# Altium PCB Copy of PCB_Winterbreak_final_404.PcbDoc
Units mil, origin at the board's own origin, x right, y up, seen from the top; angles counter-clockwise.
Board outline 8430 x 4105 mil, 2 copper layers (Top Layer, Bottom Layer); 50 components, 53 nets, 234 pads, 74 vias.
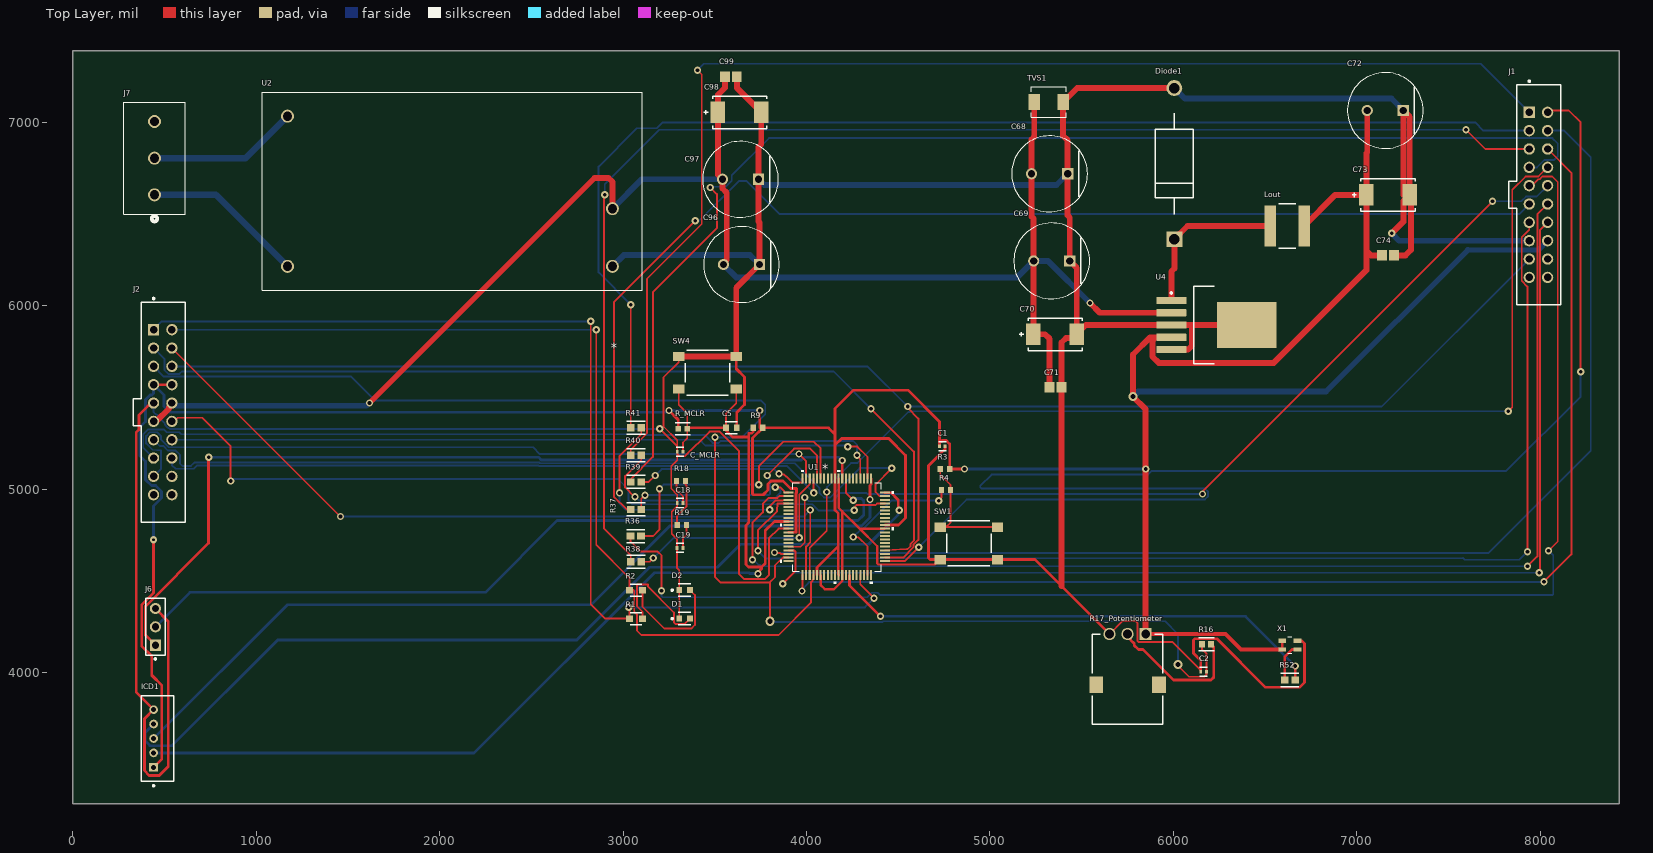
[diagram p0: Top Layer view]
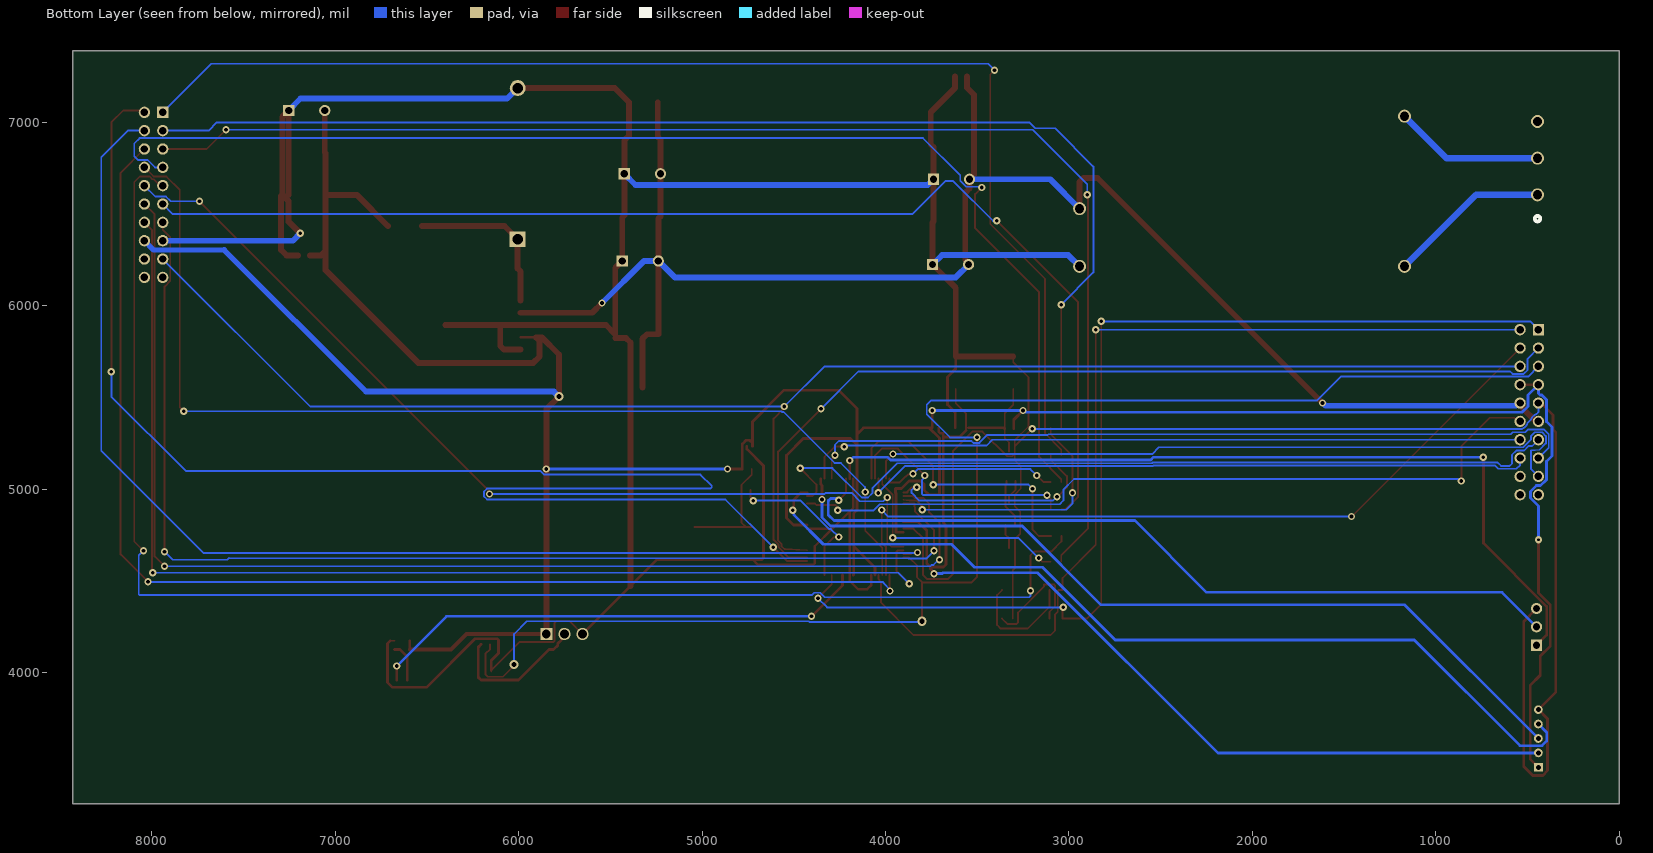
[diagram p1: Bottom Layer view, seen from below]

## Layer stack, top to bottom
Top Solder: solder mask 0.4, Solder Resist, Dk 3.5
Top Layer: signal copper 1.4
Dielectric 1: dielectric 12.6, FR-4, Dk 4.8
Bottom Layer: signal copper 1.4
Bottom Solder: solder mask 0.4, Solder Resist, Dk 3.5

## Board outline
0,3285 8430,3285 8430,7390 0,7390

## Design rules (kind name [scope] priority, off if disabled: settings)
Clearance [All] p1: gap=5 ignorepadtopadclearanceinfootprint=FALSE
ComponentClearance [All] p1 off: gap=10 collisioncheckmode=3 verticalgap=10 showdistances=FALSE
DiffPairsRouting [All] p1: maxlimit=13 minlimit=13 mostfreqgap=13 toplayer_minwidth=7.42 toplayer_maxwidth=13 toplayer_prefwidth=7.42 bottomlayer_minwidth=7.42 bottomlayer_maxwidth=13 bottomlayer_prefwidth=7.42 maxuncoupledlength=500
FabricationTestPointUsage TestPointUsage [All] p1: valid=0 allowmultiple=FALSE
FabricationTestpoint Testpoint [All] p1: side=3 testpointundercomponent=TRUE minsize=40 maxsize=100 preferedsize=60 minholesize=20 maxholesize=40 preferedholesize=32 testpointgrid=1 allowsidetop=TRUE allowsidebottom=TRUE usegrid=TRUE gridtolerance=0.01
Height [All] p1 off: minheight=0 maxheight=1000 prefheight=500
HoleSize [All] p1: absolutevalues=TRUE maxlimit=800 minlimit=10 maxpercent=80.000 minpercent=20.000
MatchedLengths MatchedLengths_I210Rx [InNetClass('I210Rx')] p1: tolerance=5 checknetsindiffpair=FALSE checkdiffpairvsdiffpair=TRUE checkxsignals=TRUE checkothers=TRUE
MatchedLengths MatchedLengths_I210Tx [InNetClass('I210Tx')] p2: tolerance=5 checknetsindiffpair=FALSE checkdiffpairvsdiffpair=TRUE checkxsignals=TRUE checkothers=TRUE
MatchedLengths MatchedLengths_mSATARx [InNetClass('mSATARx')] p3: tolerance=25 checknetsindiffpair=FALSE checkdiffpairvsdiffpair=TRUE checkxsignals=TRUE checkothers=TRUE
MatchedLengths MatchedLengths_mSATATx [InNetClass('mSATATx')] p4: tolerance=25 checknetsindiffpair=FALSE checkdiffpairvsdiffpair=TRUE checkxsignals=TRUE checkothers=TRUE
MatchedLengths MatchedLengths_PCIECLK [InNetClass('PCIECLK')] p5: tolerance=25 checknetsindiffpair=FALSE checkdiffpairvsdiffpair=TRUE checkxsignals=TRUE checkothers=TRUE
MatchedLengths MatchedLengths_PCIETx [InNetClass('PCIETx')] p6: tolerance=5 checknetsindiffpair=FALSE checkdiffpairvsdiffpair=TRUE checkxsignals=TRUE checkothers=TRUE
MatchedLengths MatchedLengths_PCIERx [InNetClass('PCIERx')] p7: tolerance=5 checknetsindiffpair=FALSE checkdiffpairvsdiffpair=TRUE checkxsignals=TRUE checkothers=TRUE
MinimumSolderMaskSliver [All] p1: minsoldermaskwidth=3.8
PlaneConnect [All] p1: planeconnectstyle=Relief reliefexpansion=20 reliefentries=4 reliefconductorwidth=15 reliefairgap=10
PolygonConnect [All] p1: connectstyle=Direct reliefconductorwidth=20 reliefentries=4 polygonreliefangle="90 Angle" airgapwidth=30
RoutingVias [All] p1: holewidth=20 width=40 viastyle="Through Hole" minholewidth=15 minwidth=35 maxholewidth=28 maxwidth=50
SilkToSilkClearance [All] p1: silktosilkclearance=5
SilkToSolderMaskClearance SilkscreenOverComponentPads [IsPad] p1: minsilkscreentomaskgap=5 clearancetoexposedcopper=TRUE
SolderMaskExpansion [All] p1: expansion=4 istentingtop=FALSE
SupplyNets "Schematic Supply Nets" [InNet('GND')] p1: voltage=0.000
Width [All] p1: maxlimit=500 minlimit=5 preferedwidth=10
20 further rules are at their usual default settings.

## Components (designator, comment, footprint, x,y, rotation, side; value= is the part's Value field where it differs from the comment)
C1 "GRM155R71C104KA88D" FP-GRM15-MFG 4740,5235 r180 top value=0.10μF
C2 "GRM155R71C104KA88D" FP-GRM15-MFG 6165,4005 r0 top value=0.10μF
C5 "CC0603KRX7R9BB471" FP-CC0603-DA-MFG 3590,5335 r0 top value="470 pF"
C18 "GRM155R71C104KA88D" FP-GRM15-MFG 3310.75,4925 r0 top value=0.10μF
C19 "GRM155R71C104KA88D" FP-GRM15-MFG 3310,4680 r0 top value=0.10μF
C68 "EEHAZS1H221B" FP-EEHA-G16-MFG 5325,6720 r180 top
C69 "EEHAZS1H221B" FP-EEHA-G16-MFG 5336.57,6245 r180 top
C70 "TAJE476K035RNJ" FP-TAJE-MFG 5355,5845 r180 top
C71 "08055C104KAZ2A" CAPC2013X94X50NL20T25 5357.48,5555 r180 top
C72 "EEHAZS1H221B" FP-EEHA-G16-MFG 7155,7065 r180 top
C73 "TAJE476K035RNJ" FP-TAJE-MFG 7170,6605 r180 top
C74 "08055C104KAZ2A" CAPC2013X94X50NL20T25 7170,6275 r180 top
C96 "EEHAZS1H221B" FP-EEHA-G16-MFG 3645,6225 r180 top
C97 "EEHAZS1H221B" FP-EEHA-G16-MFG 3640,6690 r180 top
C98 "TAJE476K035RNJ" FP-TAJE-MFG 3635,7055 r180 top
C99 "08055C104KAZ2A" CAPC2013X94X50NL20T25 3587.48,7250 r180 top
C_MCLR "GRM155R71C104KA88D" FP-GRM15-MFG 3310.75,5205 r0 top value=0.10μF
D1 "LTST-C190KGKT" FP-LTST-C190KGKT-MFG 3335,4295 r0 top
D2 "LTST-C190KGKT" FP-LTST-C190KGKT-MFG 3335,4450 r0 top
Diode1 "1N5822" FP-DO-201AD-MFG 6005,6775 r90 top
ICD1 "B5B-PH-K-S(LF)(SN)" FP-B5B-PH-K-S_LF_SN-MFG 461.65,3641.26 r90 top
J1 "SFH11-PBPC-D10-ST-BK" FP-SFH11-PBPC-D10-ST-BK-MFG 7970.31,6605 r270 top
J2 "SFH11-PBPC-D10-ST-BK" FP-SFH11-PBPC-D10-ST-BK-MFG 470.31,5420 r270 top
J6 "PREC003SAAN-RC" FP-PREC003SAAN-RC-MFG 450,4250 r90 top
J7 "TB006-508-03BE" CONN3_TB006-508_CUD 445,6605 r90 top
Lout "NR6028T680M" FP-NR6028-MFG 6620,6435 r0 top
R1 "RN73A1J470RFTD" FP-RN731J-MFG 3070,4295 r0 top value=470Ω
R2 "RN73A1J470RFTD" FP-RN731J-MFG 3070,4450 r0 top value=470Ω
R3 "ERJ3EKF1002V" RESC1609X55X30LL15T15 4754.41,5110 r0 top
R4 "ERJ-3EKF1001V" RESC1608X55X30LL15T15 4760,4995 r0 top
R9 "ERJ3EKF1002V" RESC1609X55X30LL15T15 3735.59,5335 r0 top
R16 "RR0816P-331-D" FP-RR0816-IPC_C 6180,4155 r0 top
R17_Potentiometer "P090S-14T20BR10K" RES-POT-3 5750,3935 r180 top
R18 "ERJ-3EKF1000V" RESC1608X55X30LL15T15 3315,5045 r0 top
R19 "ERJ3EKF1002V" RESC1609X55X30LL15T15 3320,4805 r0 top
R36 "RR0816Q-750-D" FP-RR0816-IPC_B 3068.57,4745 r180 top
R37 "RR0816Q-750-D" FP-RR0816-IPC_B 3070,4890 r180 top
R38 "RR0816Q-750-D" FP-RR0816-IPC_B 3070,4605 r180 top
R39 "RR0816Q-750-D" FP-RR0816-IPC_B 3070,5040 r180 top
R40 "RR0816Q-750-D" FP-RR0816-IPC_B 3070,5185 r180 top
R41 "RR0816Q-750-D" FP-RR0816-IPC_B 3070,5335 r180 top
R52 "RR0816Q-750-D" FP-RR0816-IPC_B 6635,3960 r0 top
R_MCLR "ESR03EZPJ103" FP-ESR03-IPC_C 3325,5330 r180 top
SW1 "430182043816" 430182043816 4885,4705 r0 top
SW4 "430182043816" 430182043816 3460,5635 r0 top
TVS1 "SZ1SMB36CAT3G" SMB-2_4P60X3P95_ONS 5320,7110 r180 top
U1 "DSPIC33CK256MP508-IPT" TQFP80_PT_MCH 4165,4795 r0 top
U2 "IRM-15-15" IRM-15_MWU 2941.65,6215 r180 top
U4 "LM2595S-3.3/NOPB" KTT0005B_N 6234.65,5895 r0 top
X1 "KC2520Z8.00000C1KX00" OSC_0C1KX00_AVX 6635,4150 r0 top

## Footprints (in the part's own frame and the unit in brackets; to place one, negate y for a bottom-side part, rotate by r counter-clockwise, add the part's x,y. Pads: shape width x height; smd on the part's side, far side on the other; paste and mask are expansions set on the pad)
430182043816 [mm] "SMD Tact Switch, body 6x6mm"
  rect 1.55x1.3 smd: A1(-3.975,2.25) A2(3.975,2.25) B1(-3.975,-2.25) B2(3.975,-2.25)
  silkscreen extent -3.1,-3.1 3.1,3.1, body extent -4.5,-3.1 4.5,3.1, height 4.3
CAPC2013X94X50NL20T25 [mm] "Chip Capacitor, 2-Leads, Body 2.01x1.25mm, IPC Medium Density"
  rect 1.35x1.45 smd: 1(-0.825,0) 2(0.825,0)
  body extent -1.1,-0.73 1.1,0.73, height 0.94
CONN3_TB006-508_CUD [mil]
  round 71 / inner round 60 / far side round 71 hole 51 paste-99999 mask+0: 1(0,0) 2(200,0) 3(400,0)
  silkscreen extent -145,-166 505,167
FP-B5B-PH-K-S_LF_SN-MFG [mm]
  rect 1.2x1.2 hole 0.7 paste-2539.97 mask+0: 1(-4,0.55)
  round 1.2 hole 0.7 paste-2539.97 mask+0: 2(-2,0.55) 3(0,0.55) 4(2,0.55) 5(4,0.55)
  silkscreen extent -6.67,-2.25 5.95,2.25, body extent -6.05,-2.35 6.05,2.35, height 0.25
FP-CC0603-DA-MFG [mm]
  rect 0.8x0.9 smd paste+0 mask+0: 1(-0.75,0) 2(0.75,0)
  silkscreen extent -0.85,-0.85 0.85,0.85, body extent -1.35,-0.75 1.35,0.75, height 0.25
FP-DO-201AD-MFG [mm]
  rect 2.2x2.2 hole 1.45 paste-2539.97 mask+0: 1(-10.47,0)
  round 2.2 hole 1.45 paste-2539.97 mask+0: 2(10.47,0)
  silkscreen extent -7,-2.65 7,2.65, body extent -11.67,-2.75 11.67,2.75, height 0.25
FP-EEHA-G16-MFG [mm]
  rect 1.55x1.55 hole 1 paste-2539.97 mask+0: 1(-2.5,0)
  round 1.55 hole 1 paste-2539.97 mask+0: 2(2.5,0)
  silkscreen extent -5.25,-5.25 5.25,5.25, body extent -5.35,-5.35 5.35,5.35, height 0.25
FP-ESR03-IPC_C [mil]
  rect 29.85x31.97 smd paste+0 mask+0: 1(-24.68,0) 2(24.68,0)
  silkscreen extent -40,-33 40,33, body extent -44,-22 44,22, height 10
FP-GRM15-MFG [mm]
  rect 0.4x0.5 smd paste+0 mask+0: 1(-0.4,0) 2(0.4,0)
  silkscreen extent -0.53,-0.62 0.53,0.62, body extent -0.7,-0.38 0.7,0.38, height 0.25
FP-LTST-C190KGKT-MFG [mm]
  rect 0.8x0.8 smd paste+0 mask+0: 1(-0.75,0) 2(0.75,0)
  silkscreen extent -1.85,-0.87 0.85,0.87, body extent -1.25,-0.55 1.25,0.55, height 0.25
FP-NR6028-MFG [mm]
  rect 1.6x5.7 smd paste+0 mask+0: 1(-2.35,0) 2(2.35,0)
  silkscreen extent -1.18,-3.1 1.18,3.1, body extent -3.25,-3.2 3.25,3.2, height 0.25
FP-PREC003SAAN-RC-MFG [mm]
  rect 1.55x1.55 hole 1 paste-2539.97 mask+0: 1(-2.54,0)
  round 1.55 hole 1 paste-2539.97 mask+0: 2(0,0) 3(2.54,0)
  silkscreen extent -4.57,-1.37 3.96,1.37, body extent -4.06,-1.47 4.06,1.47, height 0.25
FP-RN731J-MFG [mm]
  rect 1x0.9 smd paste+0 mask+0: 1(-0.9,0) 2(0.9,0)
  silkscreen extent -0.78,-0.82 0.78,0.82, body extent -1.5,-0.55 1.5,0.55, height 0.25
FP-RR0816-IPC_B [mil]
  rect 41.53x39.61 smd paste+0 mask+0: 1(-28.57,0) 2(28.57,0)
  silkscreen extent -49,-36 49,36, body extent -59,-30 59,30, height 10
FP-RR0816-IPC_C [mil]
  rect 33.66x35.68 smd paste+0 mask+0: 1(-24.63,0) 2(24.63,0)
  silkscreen extent -41,-35 41,35, body extent -45,-24 45,24, height 10
FP-SFH11-PBPC-D10-ST-BK-MFG [mm]
  rect 1.57x1.57 hole 1.02 paste-2539.97 mask+0: 1(-11.43,-0.77)
  round 1.57 hole 1.02 paste-2539.97 mask+0: 2(-11.43,1.77) 3(-8.89,-0.77) 4(-8.89,1.77) 5(-6.35,-0.77) 6(-6.35,1.77) 7(-3.81,-0.77) 8(-3.81,1.77) 9(-1.27,-0.77) 10(-1.27,1.77) 11(1.27,-0.77) 12(1.27,1.77) 13(3.81,-0.77) 14(3.81,1.77) 15(6.35,-0.77) 16(6.35,1.77) 17(8.89,-0.77) 18(8.89,1.77) 19(11.43,-0.77) 20(11.43,1.77)
  silkscreen extent -15.86,-3.6 15.24,3.6, body extent -15.34,-3.7 15.34,3.7, height 0.25
FP-TAJE-MFG [mm]
  rect 2x3 smd paste+0 mask+0: 1(-3,0) 2(3,0)
  silkscreen extent -3.75,-2.25 4.97,2.25, body extent -4.1,-2.35 4.1,2.35, height 0.25
IRM-15_MWU [mil]
  round 71 / inner round 60 / far side round 71 hole 51 paste-99999 mask+0: 1(0,0) 2(0,-314.96) 3(1771.65,-818.9) 4(1771.65,0)
  silkscreen extent -162,-950 1911,131
KTT0005B_N [mm] "DPAK, 5-Leads, Body 10.65x9.65mm, Pitch 1.7mm, IPC Medium Density"
  rrect10% 4.15x1 smd: 1(-6.25,3.4) 2(-6.25,1.7) 3(-6.25,0) 4(-6.25,-1.7) 5(-6.25,-3.4)
  rrect2% 8.2x6.4 smd: 6(4.2,0)
  silkscreen extent -6.37,-5.35 -0.3,5.35, body extent -3.15,-5.32 6.5,5.33, height 4.83
OSC_0C1KX00_AVX [mil]
  rect 42x24 smd paste+0 mask+0: 1(-42,23.62) 2(42,23.62) 3(42,-23.62) 4(-42,-23.62)
  silkscreen extent -11,-44 11,44, body extent -49,-37 49,37, height 32
RES-POT-3 [mm] "POT, 3-Leads, Body 9.8x12.5mm, Pitch 2.5mm"
  rect 1.7x1.7 hole 1.2: 1(-2.5,-7)
  round 1.7 hole 1.2: 2(0,-7) 3(2.5,-7)
  rect 1.9x2.3 smd: MP1(-4.35,0) MP2(4.35,0)
  silkscreen extent -4.9,-7 4.9,5.5, body extent -4.9,-7 4.9,5.5, height 26.8
RESC1608X55X30LL15T15 [mm] "Chip Resistor, 2-Leads, Body 1.60x0.80mm, IPC High Density"
  rect 0.7x0.85 smd: 1(-0.625,0) 2(0.625,0)
  body extent -0.87,-0.48 0.87,0.48, height 0.55
RESC1609X55X30LL15T15 [mm] "Chip Resistor, 2-Leads, Body 1.75x0.95mm, IPC High Density"
  rect 0.75x0.85 smd: 1(-0.65,0) 2(0.65,0)
  body extent -0.87,-0.48 0.87,0.48, height 0.55
SMB-2_4P60X3P95_ONS [mil]
  rect 63x87 smd paste+0 mask+0: 1(-78.5,0) 2(78.5,0)
  silkscreen extent -96,-83 96,83, body extent -110,-78 110,78, height 95
TQFP80_PT_MCH [mil]
  rect 53.5x11 smd paste+0 mask+0: 1(-262.75,187.01) 2(-262.75,167.32) 3(-262.75,147.64) 4(-262.75,127.95) 5(-262.75,108.27) 6(-262.75,88.58) 7(-262.75,68.9) 8(-262.75,49.21) 9(-262.75,29.53) 10(-262.75,9.84) 11(-262.75,-9.84) 12(-262.75,-29.53) 13(-262.75,-49.21) 14(-262.75,-68.9) 15(-262.75,-88.58) 16(-262.75,-108.27) 17(-262.75,-127.95) 18(-262.75,-147.64) 19(-262.75,-167.32) 20(-262.75,-187.01) 41(262.75,-187.01) 42(262.75,-167.32) 43(262.75,-147.64) 44(262.75,-127.95) 45(262.75,-108.27) 46(262.75,-88.58) 47(262.75,-68.9) 48(262.75,-49.21) 49(262.75,-29.53) 50(262.75,-9.84) 51(262.75,9.84) 52(262.75,29.53) 53(262.75,49.21) 54(262.75,68.9) 55(262.75,88.58) 56(262.75,108.27) 57(262.75,127.95) 58(262.75,147.64) 59(262.75,167.32) 60(262.75,187.01)
  rect 11x53.5 smd paste+0 mask+0: 21(-187.01,-262.75) 22(-167.32,-262.75) 23(-147.64,-262.75) 24(-127.95,-262.75) 25(-108.27,-262.75) 26(-88.58,-262.75) 27(-68.9,-262.75) 28(-49.21,-262.75) 29(-29.53,-262.75) 30(-9.84,-262.75) 31(9.84,-262.75) 32(29.53,-262.75) 33(49.21,-262.75) 34(68.9,-262.75) 35(88.58,-262.75) 36(108.27,-262.75) 37(127.95,-262.75) 38(147.64,-262.75) 39(167.32,-262.75) 40(187.01,-262.75) 61(187.01,262.75) 62(167.32,262.75) 63(147.64,262.75) 64(127.95,262.75) 65(108.27,262.75) 66(88.58,262.75) 67(68.9,262.75) 68(49.21,262.75) 69(29.53,262.75) 70(9.84,262.75) 71(-9.84,262.75) 72(-29.53,262.75) 73(-49.21,262.75) 74(-68.9,262.75) 75(-88.58,262.75) 76(-108.27,262.75) 77(-127.95,262.75) 78(-147.64,262.75) 79(-167.32,262.75) 80(-187.01,262.75)
  silkscreen extent -310,-310 310,310, body extent -276,-276 276,276, height 47

## Part data
C1 C2 C18 C19 C_MCLR: library part CMP-2100-03641-2, "CAP CER 0.1UF 16V X7R 0402", Capacitance=0.10μF, Manufacturer=Murata, Package=GRM15, Temperature="-55°C to +125°C", Temperature Characteristic=X7R, Temperature Range High=+125°C, Temperature Range Low=-55°C, Tolerance=10%, Voltage Rating=16Vdc, Category=Cap, ComponentLink2Description=Datasheet, ComponentLink2URL=https://search.murata.co.jp/Ceramy/image/img/A01X/G101/ENG/GRM155R71H471KA01-01A.pdf, Device Class L1="Passive Components", Device Class L2=Capacitors, Device Class L3="Ceramic Capacitors", Digikey Description="CAP CER 0.1UF 16V X7R 0402", Height=0.55mm, Ipc Land Pattern Name=CAPC10050X219, Lead Free=yes, Manufacturer Part Number=GRM155R71C104KA88D, Material=Ceramic, Mouser Description="0402 0.1 uF 16V ±10 % Tolerance X7R SMT Multilayer Ceramic Capacitor", Octopart=https://octopart.com/grm155r71c104ka88d-murata-196880, RoHS=TRUE, Standoff Height=0mm
C5: library part CMP-03422-001072-1, "CAP CER 470PF 50V X7R 0603", Capacitance="470 pF", Manufacturer=YAGEO, Package=CC0603-DA, Temperature="-55°C to +125°C", Temperature Characteristic=X7R, Temperature Coefficient=15%, Temperature Range High=+125°C, Temperature Range Low=-55°C, Tolerance=0.1, Voltage="50 V", Automotive=No, Category=Cap, ComponentLink2Description=Datasheet, ComponentLink2URL=http://www.yageo.com/documents/recent/UPY-GPHC_X7R_6.3V-to-50V_18.pdf, Device Class L1="Passive Components", Device Class L2=Capacitors, Device Class L3="Ceramic Capacitors", Digikey Description="CAP CER 470PF 50V X7R 0603", Footprint Url=http://www.yageo.com/exep/pages/download/literatures/UPY-C_GEN_24.pdf, Height=0.9mm, Lead Free=Yes, Manufacturer Part Number=CC0603KRX7R9BB471, Material=Ceramic, Mouser Description="Multilayer Ceramic Capacitors MLCC - SMD/SMT 470pF 50V X7R 10%", Octopart=https://octopart.com/cc0603krx7r9bb471-yageo-192931, RoHS=TRUE, Voltage Rating="50 V"
C68 C69 C72 C96 C97: library part CMP-05428-000537-1, "Conductive Polymer Hybrid Aluminum Electrolytic Capacitors 220uF ±20% 50V RADIAL TH 10x15.7mm", RoHS Compliant=Yes
C70 C73 C98: library part CMP-04424-000247-1, "47uF 35V  ±10% 900mΩ 2917  SMD Tantalum Capacitor", Capacitance=47uF, Case Code (Imperial)=2917, Case Code (Metric)=7343, Dielectric Material=Tantalum, ESR (Equivalent Series Resistance)=900mR, Leakage Current=16.5uA, Max Operating Temperature=125°C, Min Operating Temperature=-55°C, Package Quantity=1, Tolerance=10%, Voltage=35V, Case/Package=2917, Construction=Flat, Depth=4.3mm, Dissipation Factor=6%, Features="General Purpose", Height=4.1mm, Height - Seated (Max)=0.169inch, Lead Free="Lead Free", Length=7.3mm, Mount="Surface Mount", Packaging="Tape and Reel", Polarity=Polar, Radiation Hardening=No, REACH SVHC="No SVHC", RoHS Compliant=Yes, Series=TAJ, Termination=SMD/SMT, Voltage Rating=35V, Voltage Rating (DC)=35V, Width=0.169inch
C71 C74 C99: library part CMP-2007-04372-1, Manufacturer="AVX Interconnect / Elco", Part Number=08055C104KAZ2A
D1 D2: library part CMP-2000-05197-2, "LED GREEN CLEAR CHIP SMD", Case Code (Imperial)=0603, Case Code (Metric)=1608, Color=Green, Forward Current=30mA, Forward Voltage=2V, Lens Color=Colorless, Max Operating Temperature=85°C, Min Operating Temperature=-55°C, Package Quantity=1, Power Dissipation=75mW, Reverse Voltage=5V, Test Current=20mA, Case/Package=0603, Depth=0.8mm, Dominant Wavelength=571nm, Height=0.8mm, Illumination Color=Green, Lead Free="Lead Free", Length=1.6mm, Lens Style=Diffused, Lens Transparency=Clear, Luminous Intensity=35mcd, Mount="Surface Mount", Number of Elements=1, Number of LEDs=1, Number of Pins=2, Packaging="Tape and Reel", Power Rating=75mW, Radiation Hardening=No, Viewing Angle=130°, Wavelength=574nm, Width=0.8mm
Diode1: library part CMP-12187-000025-1, "DIODE SCHOTTKY 40V 3A DO201AD", Forward Current=3A, Manufacturer=STMicroelectronics, Max Junction Temp=+150°C, Max Repetitive Reverse Voltage=40V, Max Surge Forward Current=80A, Package=DO-201AD, Peak Reverse Current=2mA, Temperature="to +150°C", Automotive=No, Category=Diode, ComponentLink2Description=Datasheet, ComponentLink2URL=https://www.st.com/resource/en/datasheet/1n5822.pdf, Device Class L1="Discrete Semiconductors", Device Class L2=Diodes, Device Class L3="Schottky Diodes", Digikey Description="DIODE SCHOTTKY 40V 3A DO201AD", Height=5.3mm, Lead Free=Yes, Manufacturer Part Number=1N5822, Mouser Description="Schottky Diodes & Rectifiers Vr/40V Io/3A BULK", Octopart=https://octopart.com/1n5822-stmicroelectronics-323225, RoHS=TRUE, Temperature Range High=+150°C
ICD1: library part CMP-2000-05908-2, "CONN HEADER VERT 5POS 2MM", Color=Natural, Contact Resistance=20mR, Current Rating=2A, Flammability Rating="UL94 V-0", Housing Color=White, Insulation Resistance=1MR, Max Operating Temperature=85°C, Max Voltage Rating (AC)=100V, Min Operating Temperature=-25°C, Connector Type=Header, Contact Finish - Mating=TIN, Contact Material=Brass, Contact Mating Length=0.13inch, Contact Plating=Tin, Contact Shape=Square, Contact Type="Male Pin", Depth=4.5mm, Fastening Type=Detent, Gender=Male, Height=9.4mm, Housing Material=Polyamide, Insulation Color=Natural, Insulation Material=Nylon, Lead Free="Lead Free", Lead Pitch=2mm, Length=11.9mm, Mated Stacking Heights=8mm, Material=Polyamide, Max Current Rating=2A, Mount="Through Hole", Number of Contacts=5, Number of Pins=5, Number of Poles=5, Number of Positions=5, Number of Rows=1, Orientation=Straight, Packaging=Bulk, Pitch=2mm, REACH SVHC="No SVHC", Series=PH, Termination=Solder, Voltage Rating=100V, Voltage Rating (AC)=100V, Width=4.5mm, Working Voltage=100V
J1 J2: library part CMP-25680-000028-1, "CONN HDR 20POS 0.1 GOLD PCB", Color=Black, Package Quantity=1, Connector Type=Header, Contact Plating=Gold, Lead Free="Lead Free", Mount="Through Hole", Number of Positions=20, Number of Rows=2, Packaging=Tray, Pitch=0.1inch, Row Spacing=0.1inch, Termination=Solder
J6: library part CMP-00595-22265080-1, "PREC003SAAN-RC Conn Header Vert 3POS 2.54MM", Color=Black, Current Rating=3A, Max Operating Temperature=105°C, Min Operating Temperature=-40°C, Connector Type="Male Pin", Contact Material="Nickel, Tin", Contact Mating Length=5.842mm, Contact Plating=Tin, Height=8.74mm, Mount="Through Hole", NexarPartId=22265080, Number of Contacts=3, Number of Positions=3, Number of Rows=1, Packaging=Bulk, Pitch=2.54mm, RoHS=Compliant, Termination=Solder
J7: "No Description Available", Mfr_Name="Same Sky", Digi-Key_Part_Number_1=102-6192-ND, RefDes=RefDes, Type="Wire to Board"
Lout: library part CMP-14484-000870-1, "SMD Power Inductors 68uH ±20% 0.76A 0.546Ω", Case/Package=Nonstandard, Current Rating=770mA, DC Resistance (DCR)=546mR, Inductance=68uH, Inductance Tolerance=20%, Max Operating Temperature=120°C, Min Operating Temperature=-25°C, Package Quantity=2000, Resistor Type=Wirewound, Saturation Current=760mA, Self Resonant Frequency=5MHz, Test Frequency=100kHz, Core Material=Ferrite, Depth=6.2mm, Halogen Free="Halogen Free", Height=2.8mm, Height - Seated (Max)=0.11inch, Length=0.236inch, Max DC Current=770mA, Mount="Surface Mount", Number of Pins=2, Packaging="Tape and Reel", Radiation Hardening=No, RMS Current (Irms)=770mA, RoHS Compliant=Yes, Series=NR, Shielding=Shielded, Termination=SMD/SMT, Tolerance=20%, Width=0.236inch
R1 R2: library part CMP-03211-000951-1, "42", Manufacturer="TE Connectivity", Package=RN731J, Power Rating=0.063W, Resistance=470Ω, Temperature="-55°C to +155°C", Temperature Coefficient=5ppm/°C, Temperature Range High=+155°C, Temperature Range Low=-55°C, Voltage Rating=50V, Automotive=No, Category=Res, ComponentLink2Description=Datasheet, ComponentLink2URL=https://www.te.com/commerce/DocumentDelivery/DDEController?Action=showdoc&DocId=Data+Sheet%7F1773270%7FP%7Fpdf%7FEnglish%7FENG_DS_1773270_P.pdf%7F9-1614352-9, Composition="Thin Film", Device Class L1="Passive Components", Device Class L2=Resistors, Device Class L3="Chip SMD Resistors", Height=0.55mm, Ipc Land Pattern Name=RESC15580X45, Lead Free=Yes, Manufacturer Part Number=RN73A1J470RFTD, Octopart=https://octopart.com/rn73a1j470rftd-te+connectivity-22740827, octopart_url=https://octopart.com/rn73a1j470rftd-te+connectivity-22740827, Packaging="5000 Reel", RoHS=TRUE, Series=RN73, Tolerance=42
R3 R9 R19: library part CMP-1012-00623-3, "Chip Resistor, 10 KOhm, +/- 1%, 0.1 W, -55 to 155 degC, 0603 (1608 Metric), RoHS, Tape and Reel", Case Code (Imperial)=0603, Case Code (Metric)=1608, Manufacturer=Panasonic, Max Operating Temperature=155degC, Max Power Dissipation=100mW, Min Operating Temperature=-55degC, Package Description="2-Pin Surface Mount Device, Body 1.6 x 0.85 mm", Package Quantity=1, Package Reference=603, Resistance=10KOhm, Temperature Coefficient=100ppm\/degreesC, Tolerance=1%, Voltage Rating=75V, Case\/Package=0603, Composition=ThickFilm, Contact Plating=Tin, Datasheet URL=https://industrial.panasonic.com/cdbs/www-data/pdf/RDA0000/AOA0000C304.pdf, Datasheet Version=02/2017, Depth=0.8mm, Height=0.45mm, Lead Free=LeadFree, Length=1.6mm, Manufacturer URL=http://www.panasonic.com/, Military Standard=Not, Mount=SurfaceMount, Mounting Technology=SurfaceMount, Number of Pins=2, Number of Terminations=2, Packaging=TapeandReel, Power Rating=100mW, Radiation Hardening=No, REACH SVHC=NoSVHC, RoHSCompliant=true, Termination=SMD/SMT, Voltage Rating (DC)=75V, Width=0.031inch
R4: library part CMP-2000-00180-1, Manufacturer=Panasonic, Part Number=ERJ-3EKF1001V
R16: library part CMP-2000-02614-2, "330Ω ±0.5% 0.0625W 1/16W Chip Resistor 0603 (1608 Metric) Thin Film", Case Code (Imperial)=0603, Case Code (Metric)=1608, Max Operating Temperature=125°C, Max Power Dissipation=63mW, Min Operating Temperature=-55°C, Package Quantity=5000, Resistance=330R, Resistance Tolerance=0.5%, Resistor Type="Thin Film", Temperature Coefficient=25ppm/°C, Voltage Rating=75V, Case/Package=0603, Depth=0.8mm, Height=0.4mm, Lead Free="Lead Free", Length=1.6mm, Number of Pins=2, Number of Terminations=2, Packaging="Tape and Reel", Power Rating=63mW, RoHS Compliant=Yes, Series=RR, Size Code=0603, Technology="THIN FILM", Termination=SMD/SMT, Tolerance=0.5%, Voltage Rating (DC)=75V, Width=0.8mm
R17_Potentiometer: library part CMP-2000-06871-1, "9 mm Rotary Potentiometer, Insulated Shaft, Conductive Plastic Element, 10 KOhm, -20 to 70 degC, 3-Pin THD, RoHS, Tray", Manufacturer="BI Technologies", Package Description="POT, 3-Leads, Body 9.8 x 12.5 mm, Pitch 2.5 mm", Package Reference=POT-3, Power (Watts)=0.03W,1/32W, Power Rating=0.03W, Resistance (Ohms)=10k, Resistive Material=ConductivePlastic, Standard Package=1, Temperature Coefficient=-, Tolerance=±20%, Actuator Diameter="0.236\"(6.00mm)", Actuator Length="0.787\"(20.00mm)", Actuator Type=Knurled, Adjustment Type=TopAdjustment, Built in Switch=Detent, Bushing Thread=-, Category=Potentiometers,VariableResistors, Datasheet URL=http://www.bitechnologies.com/pdfs/p090.pdf, Datasheet Version=07/2008, Family=RotaryPotentiometers,Rheostats, Manufacturer URL=http://www.bi-technologies.net/, Mounting Technology=ThroughHole, Mounting Type=ThroughHole, Number of Gangs=1, Number of Turns=1, Online Catalog=P090Series, Other Names=987-1277P090S14T20BR10K, Package URL=http://www.bitechnologies.com/pdfs/p090.pdf, Packaging=Tray, Rotation=280°, Series=P090, Taper=Linear, Termination Style=PCBPins,BoardLocks
R18: library part CMP-2000-00179-1, Manufacturer=Panasonic, Part Number=ERJ-3EKF1000V
R36 R37 R38 R39 R40 R41 R52: library part CMP-2000-02813-2, "75Ω ±0.5% 0.0625W 1/16W Chip Resistor 0603 (1608 Metric) Thin Film", Case Code (Imperial)=0603, Case Code (Metric)=1608, Max Operating Temperature=125°C, Max Power Dissipation=63mW, Min Operating Temperature=-55°C, Package Quantity=1, Power Rating=62.5mW, Resistance=75R, Resistor Type="Thin Film", Temperature Coefficient=50ppm/°C, Tolerance=0.5%, Voltage Rating=75V, Case/Package=0603, Depth=0.8mm, Height=0.4mm, Lead Free="Lead Free", Length=1.6mm, Mount="Surface Mount", Number of Pins=2, Number of Terminations=2, Packaging="Tape and Reel", RoHS Compliant=Yes, Series=RR, Size Code=0603, Technology="THIN FILM", Termination=SMD/SMT, Voltage Rating (DC)=75V, Width=0.031inch
R_MCLR: library part CMP-08839-028975-1, "10kΩ ±5% 0.25W 0603 Anti-Surge Chip Resistor AEC-Q200", Case Code (Imperial)=0603, Case Code (Metric)=1608, Max Operating Temperature=155°C, Max Power Dissipation=250mW, Min Operating Temperature=-55°C, Package Quantity=5000, Resistance=10kR, Resistor Type="Thick Film", Temperature Coefficient=200ppm/°C, Tolerance=5%, Case/Package=0603, Height=0.022inch, Lead Free="Lead Free", Length=0.063inch, Mount="Surface Mount", Number of Terminations=2, Packaging="Tape and Reel", Power Rating=250mW, RoHS Compliant=Yes, Series=ESR03, Width=0.031inch
SW1 SW4: library part CMP-1452-00013-3, "Switch Tactile N.O. SPST Round Button Gull Wing 0.05A 12VDC 1000000Cycles 1.57N SMD Reel", Color=Black, Contact Current Rating=50mA, Contact Resistance=100mΩ, Insulation Resistance=100MΩ, Max Operating Temperature=85°C, Min Operating Temperature=-40°C, Voltage Rating=12V, Actuator Length=900µm, Actuator Material="Liquid Crystal Polymer, Polymer", Contact Material="Stainless Steel, Steel", Contact Plating=Silver, Current Rating=50mA, Diameter=3.5mm, Height=4.3mm, Illumination Type="Illuminated, Non-Illuminated", Lead Free="Lead Free", Length=6.2mm, Mechanical Life=1Mcycles, Mount="Surface Mount", Packaging="Tape and Reel", REACH SVHC="No SVHC", RoHS=Compliant, Switch Function=Off-Mom, Switch Travel=250µm, Termination="Gull Wing", Throw Configuration=SPST, Width=6.2mm
TVS1: "No Description Available", Mfr_Name=onsemi, RefDes=RefDes, Type=Type
U1: "No Description Available", Mfr_Name=Microchip, RefDes=RefDes, Type=Type
U2: "No Description Available", Mfr_Name="Mean Well", RefDes=RefDes, Type=Type
U4: library part CMP-0069-00229-3, "SIMPLE SWITCHER® Power Converter 150 KHz 1A Step-Down Voltage Regulator, 5-pin TO-263, Pb-Free", Manufacturer="Texas Instruments", PackageTopMarking="NSUZXYTTE#*LM2595S*-3.3 P+", PowerWise=N, Code_JEDEC=MO-169-AB, ComponentLink1Description="Datasheet URL", ComponentLink1URL=http://www.ti.com/general/docs/lit/getliterature.tsp?genericPartNumber=LM2595&fileType=pdf, CompType=Switcher, PackageDescription="TO-263, Molded, .400 x .390 x .180in, 5 Lead, .067in Pitch, Surface Mount", PackageReference=KTT0005B, PinCount=5, RoHS=Y
X1: "No Description Available", Mfr_Name="KYOCERA AVX", RefDes=RefDes, Type=Type

## Via types
v1: diameter 40, hole 20, Top Layer to Bottom Layer, 70 vias
v2: diameter 50, hole 28, Top Layer to Bottom Layer, 3 vias
v3: diameter 40, hole 15, Top Layer to Bottom Layer, 1 vias

## Nets (pads, with @x,y where several pads share a name; then routed paths per layer and width w, separated by ;. In a path a pad name is that pad's centre, name@x,y a point inside that pad or via, vN(x,y) a via of type N, cw(c..) or ccw(c..) an arc to the next point about the centre after c; other vN are vias at no path point)
AC/DC_out: C68.2 C69.2 C70.2 C71.2 C96.2 C97.2 C98.2 C99.2 J2.10 J2.11 TVS1.2 U2.2 U4.2 | length 9227.1
  Top Layer w10: 5236.89,6044 5238.15,6045.26
  Top Layer w32: J2.11 454.4,5370 525.09,5440.7 525.09,5447.03 540,5461.93 J2.10 ; v1(1617,5470) 2844.35,6697.35 2920,6697.35 2941.65,6675.69 U2.2 ; C96.2 3546.57,6232.85 3565,6251.28 3565,6616.06 3541.57,6639.49 C97.2 3516.89,6714.68 C98.2 3516.89,7151 3555,7189.11 C99.2 ; 5236.89,6044 C70.2 5300,5845 5325,5820 C71.2 ; 5238.15,6045.26 C69.2 5238.15,6476 5226.57,6487.58 C68.2 5226.57,6907 5241.5,6921.93 TVS1.2 ; v1(5545,6015) 5598.07,5961.93 U4.2
  Bottom Layer w32: J2.10 548.07,5470 563.07,5455 1599.84,5455 1614.84,5470 v1(1617,5470) ; U2.2 3101.69,6690 C97.2 ; C96.2 3616.57,6155 5148.15,6155 C69.2 5315,6245 v1(5545,6015)
AC/L: J7.2 U2.3 | length 819.8
  Bottom Layer w35: J7.2 941.1,6805 U2.3
AC/N: J7.1 U2.4 | length 886.5
  Bottom Layer w35: J7.1 780,6605 U2.4
AN0: J1.10 U1.16 | length 5127.6
  Top Layer w10: U1.16 3966.98,4686.73 3990,4709.76 v1(3990,4955) ; v1(6159,4974) 6164.74,4979.74 6164.74,4994.74 v1(7740,6570) v1@7740.51,6570.51
  Bottom Layer w10: v1(3990,4955) 3990.86,4955 4010.86,4935 4139.14,4935 4184.02,4979.88 4325.43,4979.88 4331.31,4974 v1(6159,4974) ; v1(7740,6570) 7897.15,6570 7923.06,6595.91 7980.91,6595.91 J1.10
AN3: J1.6 U1.21 | length 6635.7
  Top Layer w10: v1(3975,4445) 3977.99,4447.99 U1.21 ; v1(8020,4495) 8170,4645 8170,6725 J1.6
  Bottom Layer w10: v1(3975,4445) 3975,4453.12 4009.75,4487.87 4009.75,4489.14 4015.61,4495 v1(8020,4495)
AN4: J1.8 U1.23 | length 5863.1
  Top Layer w10: U1.23 4017.36,4681.6 4110,4774.23 v1(4110,4985) ; v1(7825,5425) 7847,5447 7847,6632 7920,6705 7990,6705 J1.8
  Bottom Layer w10: v1(4110,4985) 4112.25,4987.25 4112.25,5012.25 4243.13,5143.13 4277.48,5143.13 4555.34,5421 4563.43,5421 4567.43,5425 v1(7825,5425)
AN21_RE1: C19.2 R19.2 | length 133.2
  Top Layer w10: C19.2 3325.75,4732 3345.59,4751.84 R19.2
AN21_VBUS: R18.2 R19.1 | length 263.2
  Top Layer w10: R19.1 3294.41,4854.41 3345,4905 3345,5021 3339.61,5026.39 R18.2
ANA0: J1.2 U1.41 | length 8374.2
  Top Layer w10: U1.41 4536.41,4607.99 v1(4612.41,4684) ; J1.2 8050,7065 8155,7065 8220,7000 v1(8220,5639.86)
  Bottom Layer w10: v1(4612.41,4684) 4872.41,4944 6171.43,4944 6189,4961.57 6189,4986.43 6171.43,5004 4952.41,5004 4946.56,5009.86 4946.56,5018.14 5008.41,5080 5860.85,5080 5880.85,5100 7815,5100 8220,5505 v1(8220,5639.86)
ANA1: J1.4 U1.18 | length 6657.8
  Top Layer w10: v1(3825,4655) 3828.19,4651.81 3856.31,4651.81 3860.76,4647.36 U1.18
  Bottom Layer w10: v1(3825,4655) 3828,4652 7717,4652 8275,5210 8275,6810 8130,6955 J1.4
buck_out_+3V3: C1.2 C72.2 C73.2 C74.2 ICD1.1 J1.16 J2.7 J2.8 Lout.2 R3.2 R9.2 R17_Potentiometer.1 R_MCLR.2 U1.12 U1.25 U1.31 U1.51 U1.71 U4.4 X1.1 X1.4 | length 19651.6
  Top Layer w15: ICD1.1 485,3528.78 485,3931 430,3986 430,4091.3 375,4146.3 375,4369.28 440,4434.28 v3(440,4725) ; J2.7 J2.8 ; v1(3250,5429) 3300.32,5378.68 R_MCLR.2 ; v1(3745,5429) 3745,5335 R9.2 ; U1.12 3942.5,4765.47 3942.5,4978.25 3945,4980.75 3945,5004 3913,5004 3872,5045 3807.43,5045 3790,5027.57 3790,4996.38 3763.62,4970 3710.86,4970 3705,4975.86 3705,5278.82 R9.2 ; U1.25 4056.73,4573.57 4173.16,4690 ; U1.31 4173.16,4533.93 4173.16,4690 ; U1.51 4500.84,4804.84 4540,4844 4540,5185 4448,5277 4192,5277 4155.16,5240.16 ; C1.2 4724.25,5251.25 ; v1(4861,5110) R3.2 4780,5247 4760,5267 4740,5267 4724.25,5251.25 ; 5904.07,5828.07 U4.4 ; X1.4 X1.1 ; 7051.89,6832 7056.57,6836.68 ; R9.2 4120.16,5335 4155.16,5300 ; 4155.16,5240.16 U1.71 4155.16,4886 4173.16,4868 4173.16,4690 ; 4155.16,5240.16 4155.16,5300 ; 4155.16,5300 4155.16,5440.16 4255,5540 4552,5540 4724.25,5367.75 4724.25,5251.25
  Top Layer w20: R17_Potentiometer.1 6284.41,4210.59 6368.62,4126.38 X1.4
  Top Layer w32: R17_Potentiometer.1 5848.43,5436.57 v2(5780,5505) 5780,5735 5873.07,5828.07 5904.07,5828.07 5885,5809 5885,5724 5920,5689 6547,5689 7051.89,6193.89 7051.89,6300 ; Lout.2 6882.52,6605 C73.2 ; 7051.89,6832 C73.2 ; 7056.57,6836.68 C72.2 ; C74.2 7076.89,6275 7051.89,6300 ; 7051.89,6300 C73.2
  Bottom Layer w15: J2.7@438.4,5571.6 496.59,5513.41 496.59,5452.02 528.62,5420 3234.24,5420 3243.24,5429 v1(3250,5429) v1(3745,5429) ; v3(440,4725) 440,4908.62 483.41,4952.02 483.41,4987.98 451.38,5020 428.62,5020 396.59,5052.02 396.59,5152.02 366.59,5182.02 366.59,5338.32 396.59,5368.32 396.59,5487.98 422.02,5513.41 431.21,5513.41 440,5522.19 J2.7 ; v1(4861,5110) v1(5848.43,5110)
  Bottom Layer w28: 7605,6305 7990,6305
  Bottom Layer w29: 6832.12,5532.12 7605,6305 ; 7990,6305 J1.16
  Bottom Layer w32: v2(5780,5505) 5780.62,5505 5807.75,5532.12 6832.12,5532.12
GND: C1.1 C2.1 C5.2 C18.1 C19.1 C68.1 C69.1 C70.1 C71.1 C72.1 C73.1 C74.1 C96.1 C97.1 C98.1 C99.1 C_MCLR.1 D1.1 D2.1 Diode1.2 ICD1.5 J1.15 J2.9 J6.3 R17_Potentiometer.3 SW1.B1 SW1.B2 SW4.A1 SW4.A2 TVS1.1 U1.11 U1.26 U1.32 U1.50 U1.70 U2.1 U4.3 U4.5 U4.6 X1.2 | length 27777.3
  Top Layer w10: v1(3200,5329) 3295,5234 ; SW4.A1 3303.5,5693 3220,5609.5 3220,5342 3295,5267 3295,5234 ; D1.1 D2.1 3305.47,4559 3294.25,4570.22 C19.1 3294.25,4727 3265,4756.25 3265,4877 3295,4907 C18.1 3295,4971 3262,5004 3262,5125 3295,5158 3295,5194 ; 3738.43,6460 3743.43,6455 ; U1.11 3847.16,4785.16 3795,4733 3795,4532 3773,4510 3661,4510 3631,4540 3631,5209 3526,5314 3471,5314 3337,5180 3309,5180 3295,5194 ; SW1.B1@4723.58,4616.42 SW1.B1 ; C70.1@5473.11,5825 C70.1 ; R17_Potentiometer.3 5720.98,4280 5794.98,4280 5804,4270.98 5804,4173 5810,4167 5996.25,4167 6149.25,4014 C2.1 ; X1.2 6700,4173.62 ; 7253.43,6545.09 7253.74,6545.4 ; 3295,5194 C_MCLR.1 3295,5234
  Top Layer w13: U1.26 4076.42,4478.58 4100,4455 4149.53,4455 4194.53,4500 U1.32 4194.53,4879.31 ; U1.70 4174.84,4955.16 4174.84,4899 4194.53,4879.31 ; U1.50 4288.68,4785.16 ; SW1.B1@4723.58,4616.42 4697.16,4590 4390.86,4590 4385,4595.86 4385,4688.84 4288.68,4785.16 ; 4194.53,4879.31 4288.68,4785.16
  Top Layer w15: J2.9@420,5465 420,5462.67 412.07,5454.74 409.74,5454.74 360,5405 360,5325 345,5310 345,3893.74 ICD1.5 390,3748.74 390,3466 416,3440 471,3440 520,3489 520,4280 J6.3 ; SW4.A2 3616.5,5657 3662,5611.5 3662,5461 3619.53,5418.53 C5.2 ; C1.1 4755.75,5218.75 4665,5128 4665,4625.2 4673.79,4616.42 SW1.B1 SW1.B2 5245.75,4616.42 5389.96,4472.2 R17_Potentiometer.3 ; 6080,5895 6100,5875 ; C2.1@6149.25,4014 6149.25,4066.75 6110,4106 6110,4176.55 6118.79,4185.34 6226.64,4185.34 6226.98,4185 6238,4185 6503,3920 6688,3920 6715,3947 6715,4158.62 6700,4173.62
  Top Layer w32: SW4.A1 SW4.A2 3616.5,6098.07 C96.1 3743.43,6455 ; C99.1 3619.96,7188.15 C98.1 3753.11,6879.68 3738.43,6865 C97.1 3738.43,6460 ; 5389.96,4472.2 C71.1 5389.96,5800 5414.96,5825 C70.1@5473.11,5825 ; U4.5 6080,5761.14 6100,5781.14 6100,5875 ; Diode1.2 5475.7,7187.2 TVS1.1 5398.5,6926.93 5423.43,6902 C68.1 5423.43,6493.57 5435,6482 C69.1 5473.11,6206.89 C70.1 5523.11,5895 U4.3 6080,5895 U4.6 ; v1(7190,6395) 7253.43,6458.43 7253.43,6545.09 ; C74.1 7265,6275 7295,6305 7295,6598.11 C73.1 ; C73.1@7253.43,6605 C72.1 7288.11,7030.32 C73.1 ; 7253.74,6545.4 7253.74,6570.63 C73.1
  Bottom Layer w10: J2.9 440,5420 450.45,5409.55 cw(c440,5370) 479.55,5380.45 500.45,5359.55 ccw(c540,5370) 522.49,5333.03 531,5329 534.74,5329 v1(3200,5329)
  Bottom Layer w32: U2.1 3003.17,6276.51 3691.91,6276.51 C96.1 ; C97.1 3769.43,6659 5362.43,6659 C68.1 ; Diode1.2 6062.2,7130 7188.43,7130 C72.1 ; v1(7190,6395) 7230,6355 J1.15
MCLR: C5.1 C_MCLR.2 ICD1.2 R9.1 R_MCLR.1 SW4.B1 SW4.B2 U1.9 | length 5935.5
  Top Layer w10: SW4.B1 3303.5,5461.18 3349.68,5415 R_MCLR.1 3349.68,5278.19 3326.5,5255 C_MCLR.2 ; C5.1@3546,5335 C5.1 ; C5.1@3560.47,5320.26 C5.1 ; SW4.B2 3616.5,5468.02 3560.47,5412 C5.1
  Top Layer w15: R_MCLR.1 3354.68,5335 C5.1@3546,5335 ; C5.1@3560.47,5320.26 3595.74,5285 3685,5285 ; R9.1 3710,5314.97 3700,5304.97 3685,5304.97 3685,5285 ; v1(3735,4540) 3735,4546.76 3755.03,4566.8 3755.03,4576.03 ; U1.9 3825.53,4824.53 3775,4774 3775,4596 3755.03,4576.03 ; 3685,5285 3685,4818 3670,4803 3670,4590 3683.97,4576.03 3755.03,4576.03
  Bottom Layer w15: ICD1.2 2187.52,3562.52 3170,4545 3685,4545 3690,4540 v1(3735,4540)
NetC18_2: C18.2 R18.1 | length 135
  Top Layer w10: R18.1 3290.39,4997 3326.5,4960.9 C18.2
NetD1_2: D1.2 R1.2 | length 623.2
  Top Layer w10: R1.2 3105.43,4332 3075.67,4361.76 3075.67,4476.67 3080,4481 3134,4481 3135,4480 3135,4470 3277,4328 3277,4274 3285,4266 3335.53,4266 D1.2
NetD2_2: D2.2 R2.2 | length 634.5
  Top Layer w10: R2.2 3105.43,4360 3225.43,4240 3371,4240 3391,4260 3391,4423.53 D2.2
NetDiode1_1: Diode1.1 Lout.1 U4.1 | length 893.1
  Top Layer w32: U4.1 5988.58,6187 6005,6203.42 Diode1.1 6077.2,6435 Lout.1
NetR3_1: R3.1 R4.2 SW1.A1 SW1.A2 | length 662.7
  Top Layer w10: SW1.A1 4760,4793.58 ; R3.1 4728.82,5080 4784.61,5024.21 R4.2 4784.61,4818.19 4760,4793.58 ; SW1.A2 4760,4793.58
NetR16_2: R16.2 R17_Potentiometer.2 | length 781.1
  Top Layer w15: R17_Potentiometer.2 5750,4196.54 5766.78,4179.76 5766.78,4178.22 5786.6,4158.4 5786.6,4148.77 5809.13,4126.24 5834.35,4126.24 6000.59,3960 6205,3960 6220,3975 6220,4138.62 6204.63,4153.99 R16.2
NetR36_1: R36.1 U1.75 | length 1561.9
  Top Layer w10: R36.1 3163,4745 3198,4780 v1(3198,5003) ; v1(3740,5025) 3740,5126 3873,5259 4040,5259 4076.42,5222.58 U1.75
  Bottom Layer w10: v1(3198,5003) 3220,5025 v1(3740,5025)
NetR37_1: R37.1 U1.76 | length 1351.7
  Top Layer w10: R37.1 3098.57,4947 v1(3119.57,4968) ; v1(3785,5075) 3932,5222 4019,5222 4056.73,5184.27 U1.76
  Bottom Layer w10: v1(3119.57,4968) 3794.14,4968 3800,4973.86 3800,5051.88 3785,5066.88 v1(3785,5075)
NetR38_1: R38.1 U1.78 | length 1261.8
  Top Layer w10: R38.1 3144.14,4605 3164.14,4625 v1(3165,4625) ; v1(3960,4735) 3960,4971 4017.36,5028.36 U1.78
  Bottom Layer w10: v1(3165,4625) 3275,4735 v1(3960,4735)
NetR39_1: R39.1 U1.80 | length 959.1
  Top Layer w10: R39.1 3140,5040 v1(3175,5075) ; v1(3850,5085) 3853.86,5081.14 3875.64,5081.14 3886.79,5070 3890,5070 3923,5037 3977.49,5037 3977.99,5037.5 U1.80
  Bottom Layer w10: v1(3175,5075) 3210,5110 3823.14,5110 3848.14,5085 v1(3850,5085)
NetR40_1: R40.1 U1.1 | length 1240.9
  Top Layer w10: v1(3065,4960) 3060.86,4960 3010.67,5010.19 3010.67,5071.52 3098.57,5159.43 R40.1 ; v1(3830,5010) 3831.25,5008.75 3858.25,5008.75 3879,4988 3879,4982.01 U1.1
  Bottom Layer w10: v1(3065,4960) 3087,4938 3815,4938 3857,4980 3857,4995.79 3848.53,5004.26 3835.74,5004.26 v1(3830,5010)
NetR41_1: R41.1 U1.3 | length 1430
  Top Layer w10: v1(2980,4980) 2980,5180.43 3098.57,5299 R41.1 ; v1(3799,4888) 3799,4906.95 3830,4937.95 3868.31,4937.95 U1.3
  Bottom Layer w10: v1(2980,4980) 2980,4923 3015,4888 v1(3799,4888)
NetR52_1: R52.1 X1.3 | length 213.5
  Top Layer w15: R52.1 6606.43,4086.43 6646.38,4126.38 X1.3
PGC1: ICD1.3 U1.61 | length 4618.7
  Top Layer w15: v1(4346,4944) 4346,5021 4352.01,5027.01 U1.61
  Bottom Layer w15: ICD1.3 1168.74,4370 2824,4370 3254,4800 4299,4800 4346,4847 v1(4346,4944)
PGD1: ICD1.4 U1.60 | length 4922.5
  Top Layer w10: U1.60 U1.60@4428.25,4981.51
  Top Layer w15: U1.60@4428.25,4981.51 4460.5,4981.51 4500,4942.01 4500,4906.29 4500.22,4906.07 4500.22,4889.78 v1(4505,4885)
  Bottom Layer w10: 4498.98,4860.86 4498.98,4864.14 4499.26,4864.43 4499.26,4879.26 v1(4505,4885)
  Bottom Layer w15: ICD1.4 395,3675 395,3627 420,3602 541,3602 1117,4178 2747,4178 3144,4575 3515,4575 3640,4700 4339,4700 4489.75,4850.75 4489.75,4851.63 4498.98,4860.86
RB0_CLKI: R52.2 U1.34 | length 2744.4
  Top Layer w15: U1.34 4233.9,4476.1 v1(4403,4307) ; R52.2 v1(6663.57,4036.43)
  Bottom Layer w15: v1(4403,4307) 6393,4307 v1(6663.57,4036.43)
RE0: J1.12 U1.2 | length 6746.5
  Top Layer w10: v1(3705,4615) 3705,4816.65 3761.95,4873.6 3761.95,4920 3794.9,4952.95 3841.3,4952.95 3850.67,4962.32 U1.2 ; v1(7930,4580) 7984.09,4634.09 7984.09,6499.09 J1.12
  Bottom Layer w10: v1(3705,4615) 3710.86,4615 3738.86,4587 3748.43,4587 3755.43,4580 v1(7930,4580)
RE1: J1.13 U1.4 | length 6424.1
  Top Layer w10: v1(3735,4665) 3735,4775.74 3836.5,4877.24 3839.26,4880 3839.42,4883.9 3841,4922.95 U1.4 ; v1(7930,4659) 7930,6105 7899.09,6135.91 7899.09,6374.09 7940,6415 J1.13
  Bottom Layer w10: v1(3735,4665) 3735,4664 3777,4622 3876,4622 7577.95,4626 7588.67,4615.27 7886.27,4615.27 v1(7930,4659)
RE2: J1.14 U1.17 | length 6320.9
  Top Layer w10: v1(3870,4485) 3939,4554 3939,4660.05 3932.5,4666.55 3902.75,4666.55 U1.17 ; v1(7995,4545) 7999.09,4549.09 7999.09,6414.09 J1.14
  Bottom Layer w10: v1(3870,4485) 3930,4545 v1@7994.14,4545
RE3: C2.2 J2.5 R16.1 U1.19 | length 8070.4
  Top Layer w10: v1(3501,5283) 3501,4520 3529,4492 3800,4492 ; v2(3800,4280) 3800,4492 ; U1.19 3871,4627.68 3828,4584.68 3828,4520 3800,4492 ; v2(6025,4045) 6025,4037.5 6085,3977.5 6167.5,3977.5 6180.75,3990.75 C2.2 6180.75,4103 6155.37,4128.38 R16.1
  Bottom Layer w10: J2.5 495.91,5614.09 1516.91,5614.09 1647,5484 3751,5484 3775,5460 3775,5410 3648,5283 v1(3501,5283) ; v2(3800,4280) 3803,4277 4415.43,4277 4418.43,4280 5955,4280 6025,4210 v2(6025,4045)
RE4: J2.4 U1.22 | length 4239.6
  Top Layer w10: J2.4 v1(1459,4851) ; U1.22 3997.68,4687.68 4020,4710 v1(4020,4887)
  Bottom Layer w10: v1(1459,4851) 3984,4851 v1(4020,4887)
RE5_LED2: J2.2 R2.1 U1.24 | length 5245.6
  Top Layer w10: v1(2853,5870) 2853,4697 3034.57,4515.43 R2.1 3055.67,4450 3060.67,4445 3060.67,4332.33 3075,4318 3075,4230 3100,4205 3847,4205 4025,4383 4025,4493.5 4032.86,4501.36 4032.86,4506.81 4037.05,4511 U1.24
  Bottom Layer w10: J2.2 v1(2853,5870)
RE6_LED1: J2.1 R1.1 U1.37 | length 5765.9
  Top Layer w10: v1(2823,5915) 2823,4374 2902,4295 R1.1 3034.57,4351.43 v1(3030,4356) ; U1.37 4292.95,4481.05 v1(4368,4406)
  Bottom Layer w10: J2.1 485,5915 v1(2823,5915) ; v1(3030,4356) 4318,4356 v1(4368,4406)
RE7_S1: R4.1 U1.39 | length 865.4
  Top Layer w10: v1(4255,4740) 4256.75,4738.25 4282.75,4738.25 4332.32,4688.68 U1.39 ; v1(4720,4938) 4735.39,4953.39 R4.1
  Bottom Layer w10: v1(4255,4740) 4297.5,4782.5 4306.25,4782.5 4461.75,4938 v1(4720,4938)
RE8: J1.17 J2.6 U1.42 | length 8804.9
  Top Layer w10: U1.42 4526.68,4627.68 4582.41,4683.41 4582.41,4696.43 4610,4724.01 4610,5385.14 4551,5444.14 v1(4551,5451)
  Bottom Layer w10: J2.6 4332,5670 v1(4551,5451) 7136,5451 J1.17
RE9: J2.3 U1.44 | length 5094.3
  Top Layer w10: v1(4351,5439) 4585,5205 4585,4720.23 4567.41,4702.64 4567.41,4689.63 4554.75,4676.96 4552.06,4674.27 4548.26,4674.05 U1.44
  Bottom Layer w10: J2.3 499,5711 499,5650.09 520,5629.09 581,5629.09 593.91,5642 4148,5642 v1(4351,5439)
RE10: J2.12 U1.57 | length 4285.8
  Top Layer w10: J2.12 551.76,5370 571.76,5390 705,5390 860,5235 v1(860,5045) ; v1(4260,4885) 4265.74,4890.74 4265.74,4907.45 4272.25,4913.96 4375.86,4913.96 4384.85,4922.95 U1.57
  Bottom Layer w10: v1(860,5045) 868.12,5045 879.12,5056 2972,5056 3030,4998 3030,4938.79 3050.79,4918 4031.43,4918 4064.43,4885 v1(4260,4885)
RE11: J2.13 U1.59 | length 4508.6
  Top Layer w10: U1.59 4398.68,4962.32 4376,4985 4376,5026 v1(4465,5115)
  Bottom Layer w10: J2.13 475,5235 494.69,5235 518.69,5211 560,5211 584,5187 584,5140 597,5127 644,5127 662,5145 2543.5,5145 2546.5,5142 3936,5142 4070,5008 4070,4980 4095,4955 4129.02,4955 4289.02,5115 v1(4465,5115)
RE12: J2.14 U1.62 | length 3950.4
  Top Layer w10: v1(4225,5232.32) 4277.48,5232.32 4332.32,5177.48 U1.62
  Bottom Layer w10: J2.14 3417,5270 3449,5238 4219.32,5238 v1(4225,5232.32)
RE13: J2.15 U1.64 | length 4289.8
  Top Layer w10: v1(4275,5185) 4275,5182.09 4292.95,5164.14 U1.64
  Bottom Layer w10: J2.15 384.09,5225.91 384.09,5300 410,5325.91 495.91,5325.91 510.81,5311 581,5311 592,5300 3111,5300 3115,5296 3445,5296 3488,5253 3521,5253 3531,5263 4254.48,5263 4275,5242.48 v1(4275,5185)
RE14: J2.16 U1.77 | length 3694.8
  Top Layer w10: U1.77 4037.05,4982.95 v1(4040,4980)
  Bottom Layer w10: J2.16 540,5132 560,5112 659,5112 677,5130 2537.29,5130 2540.29,5127 3893,5127 v1(4040,4980)
RE15: J2.17 U1.79 | length 4074.4
  Top Layer w10: v1(3959,5192) 3997.68,5153.32 U1.79
  Bottom Layer w10: J2.17 481,5111 481,5211 434.09,5215 399.09,5250 399.09,5290 420,5310.91 460,5310.91 480.91,5290 480.91,5270 521.81,5229.09 2508.91,5229.09 2546,5192 v1(3959,5192)
RP42_PWM3H: J1.9 R36.2 | length 7785.6
  Top Layer w10: R36.2 3040,4716 3096,4660 3189,4660 3209,4640 v1(3209,4446) ; J1.9@7955,6655 7990,6690 7996.21,6690 8011.21,6705 8065,6705 8095,6675 8095,6521.9 8095,6437.01 8095,6337.01 8095,6237.01 8095,6137.01 8095,4715 v1(8045,4665)
  Bottom Layer w10: v1(3209,4446) 3209.42,4445.58 3209.42,4416.93 3215.28,4411.07 4330.64,4411.07 4355.57,4436 4387.86,4436 4401.16,4422.7 8064.84,4422.7 8070.7,4428.56 8070.7,4639.3 v1(8045,4665)
RP43_PWM3L: J1.11 R37.2 | length 6540.6
  Top Layer w10: R37.2 3020,4890 2950,4960 2950,6019 v1(3394,6463)
  Bottom Layer w10: v1(3394,6463) 3413.61,6463 3630.61,6680 3673.26,6680 3853.26,6500 7885,6500 J1.11
RP44_PWM2H: J1.5 R38.2 | length 7327
  Top Layer w10: v1(2900,6605) 2896,6601 2896,4785.43 3041.43,4640 R38.2 ; v1(7595,6960) 7700,6855 J1.5
  Bottom Layer w10: v1(2900,6605) 2900,6664 3196,6960 v1(7595,6960)
RP45_PWM2L: J1.7 R39.2 | length 6826.2
  Top Layer w10: R39.2 3041.43,5055.43 3162,5176 3162,6075 3511,6424 3511,6609 v1(3475,6645)
  Bottom Layer w10: v1(3475,6645) 3479.49,6649.49 3560.49,6649.49 3592,6681 3592,6711 3796,6915 7931.44,6915 ccw(c7940,6955) 7940.59,6914.1 8005,6914.99 8005.89,6914.09 8065.91,6914.09 8095,6885 8095,6815 8075.91,6795.91 8023.06,6795.91 7982.15,6755 J1.7
RP46_PWM1H: J1.1 R40.2 | length 6929.7
  Top Layer w10: R40.2 3041.43,5216.43 3130,5305 3130,6147 3429,6446 3429,7261 v1(3405,7285)
  Bottom Layer w10: v1(3405,7285) 3440,7320 7675,7320 J1.1
RP47_PWM1L: J1.3 R41.2 | length 6689.1
  Top Layer w10: R41.2 v1(3041.43,6006.57)
  Bottom Layer w10: v1(3041.43,6006.57) 2866,6182 2866,6759 3075.27,6968.27 3183.06,6968.27 3214.79,7000 7645,7000 7690,6955 J1.3
RP67_RD3_UART_RX: J6.1 U1.69 | length 4764.8
  Top Layer w15: J6.1 395,4205 395,4361 740,4706 v1(740,5175) ; U1.69 v1(4194.53,5157)
  Bottom Layer w15: v1(740,5175) 2538.25,5175 2553.75,5159.5 3972.46,5159.5 3987.96,5175 4173.24,5175 4191.24,5157 v1(4194.53,5157)
RP68_RD4_UART_TX: J6.2 U1.68 | length 4392.3
  Top Layer w12: U1.68 4214.21,4980.79 v1(4255,4940)
  Bottom Layer w15: J6.2 638,4438 2249,4438 2640,4829 4281,4829 4312,4860 4312,4937.21 4300,4949.21 4270.98,4949.21 4261.76,4940 v1(4255,4940)
pads on no net: J1.18 J1.19 J1.20 J2.18 J2.19 J2.20 J7.3 R17_Potentiometer.MP1 R17_Potentiometer.MP2 U1.5 U1.6 U1.7 U1.8 U1.10 U1.13 U1.14 U1.15 U1.20 U1.27 U1.28 U1.29 U1.30 U1.33 U1.35 U1.36 U1.38 U1.40 U1.43 U1.45 U1.46 U1.47 U1.48 U1.49 U1.52 U1.53 U1.54 U1.55 U1.56 U1.58 U1.63 U1.65 U1.66 U1.67 U1.72 U1.73 U1.74

## Silkscreen, mask and mechanical layers (free items; w line width, h text height)
Mechanical 1:
  the board outline again, w10

## Text inside footprints (layer, text, board x,y; h text height)
U1: Top 3D Body "*" at 3931.5,4966.85 h50; Top Overlay "*" at 4085,5090 h50
U2: Top 3D Body "*" at 2966.65,5965 h50 r180; Top Overlay "*" at 2966.65,5815 h50 r180